# Altium PCB 2 wire active electrode.PcbDoc
Units mil, origin at the board's own origin, x right, y up, seen from the top; angles counter-clockwise.
Board outline 400 x 250 mil, 2 copper layers (Top Layer, Bottom Layer); 3 components, 4 nets, 12 pads, 0 vias.
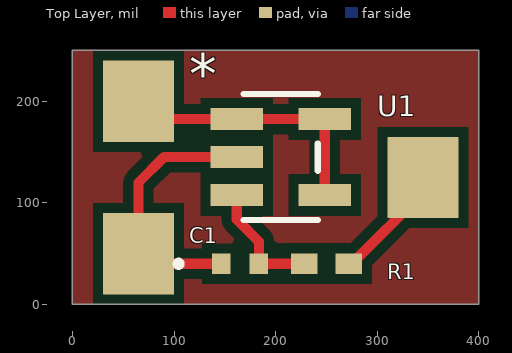
[diagram p0: Top Layer view]
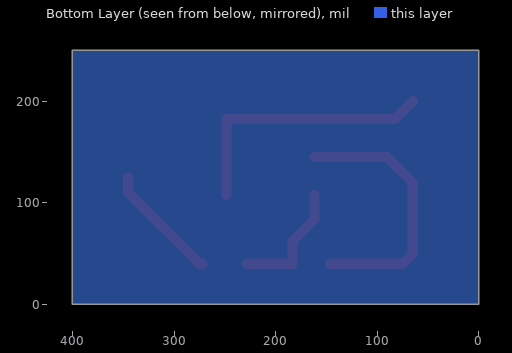
[diagram p1: Bottom Layer view, seen from below]
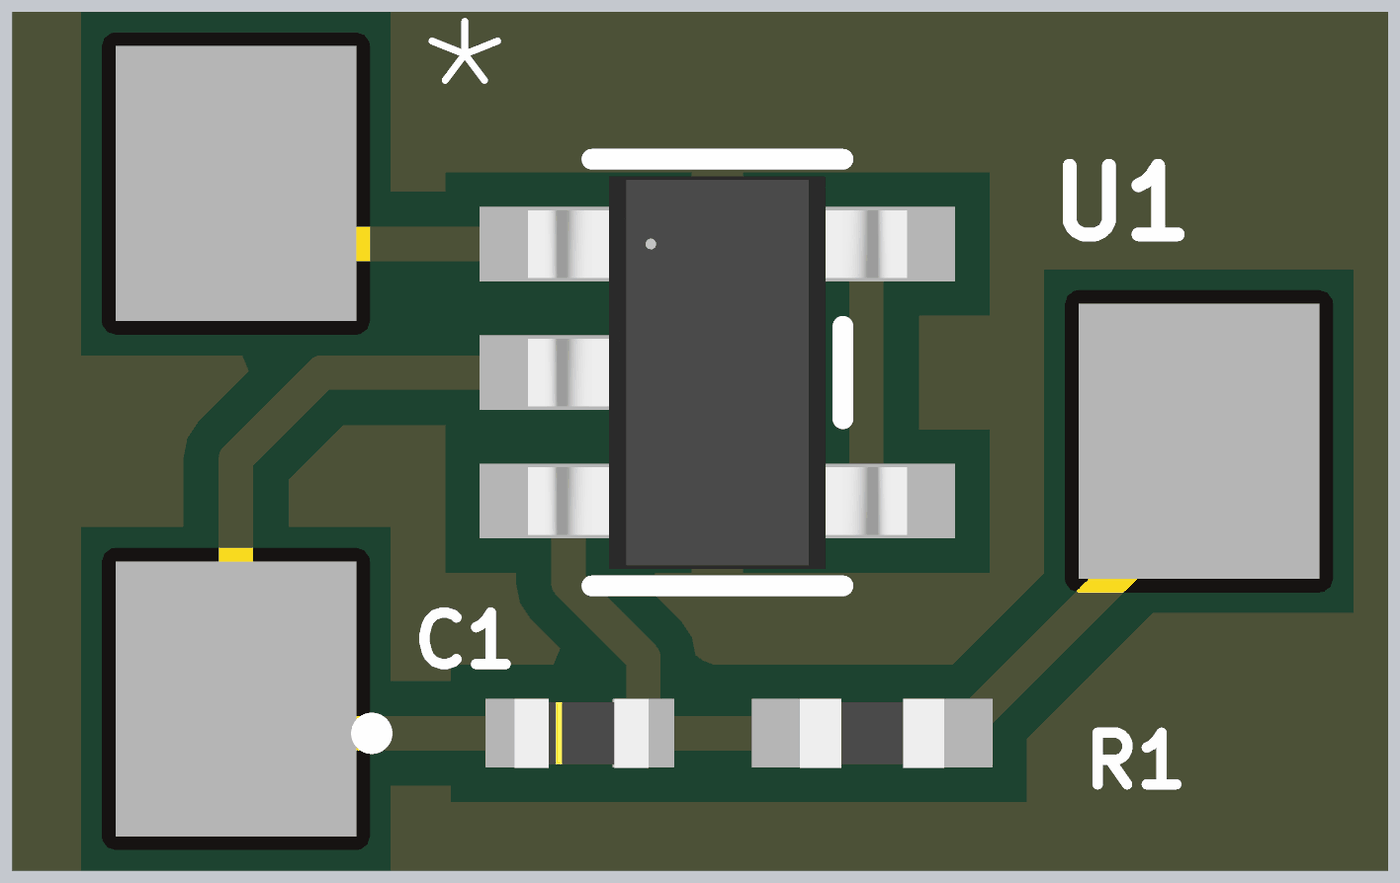
[diagram p2: 3D render of the assembled board from above, using the file's embedded part models]

## Layer stack, top to bottom
Top Solder: solder mask 0.4, Solder Resist, Dk 3.5
Top Layer: signal copper 1.4
Dielectric 1: dielectric 12.6, FR-4, Dk 4.8
Bottom Layer: signal copper 1.4
Bottom Solder: solder mask 0.4, Solder Resist, Dk 3.5

## Board outline
0,0 400,0 400,250 0,250

## Design rules (kind name [scope] priority, off if disabled: settings)
Clearance [All] p1: gap=10 ignorepadtopadclearanceinfootprint=FALSE except(0: Arc-Hole Track-Hole SMDPad-Hole THPad-Hole Via-Hole Fill-Hole Poly-Hole Region-Hole Text-Hole)
PolygonConnect [All] p1: connectstyle=Relief reliefconductorwidth=10 reliefentries=4 polygonreliefangle="90 Angle" airgapwidth=10
RoutingVias [All] p1: holewidth=28 width=50 viastyle="Through Hole" minholewidth=28 minwidth=50 maxholewidth=28 maxwidth=50
SilkToSolderMaskClearance [IsPad] p1: minsilkscreentomaskgap=9 clearancetoexposedcopper=TRUE
SolderMaskExpansion [All] p1: expansion=4
Width [All] p1: maxlimit=10 minlimit=10 preferedwidth=10
29 further rules are at their usual default settings.

## Classes and differential pairs
component class 2wire: R1 U1

## Components (designator, comment, footprint, x,y, rotation, side; value= is the part's Value field where it differs from the comment)
C1 "C0402C241J3GAC7867" G-155 165,40 r0 top value=240pF
R1 "Part Number: RC0402JR-0710KL" RC0402N 250,40 r180 top value=Value
U1 "Part Number: AD8603AUJZ-R2" UJ_5 205,145 r0 top value=Value

## Footprints (in the part's own frame and the unit in brackets; to place one, negate y for a bottom-side part, rotate by r counter-clockwise, add the part's x,y. Pads: shape width x height; smd on the part's side, far side on the other; paste and mask are expansions set on the pad)
G-155 [mil]
  rect 18x20 smd paste+0 mask+0: 1(-18.5,0) 2(18.5,0)
  silkscreen extent -63,-3 -58,3, body extent -19,-10 20,10, height 22
RC0402N [mil]
  rect 26x20 smd paste+0 mask+0: 1(-22,0) 2(22,0)
  body extent -21,-10 21,10, height 28
UJ_5 [mm]
  rect 1.311x0.551 smd paste+0 mask+0: 1(-1.1,0.95) 2(-1.1,0) 3(-1.1,-0.95) 4(1.1,-0.95) 5(1.1,0.95)
  silkscreen extent -0.93,-1.58 0.93,1.58, body extent -1.4,-1.45 1.4,1.45, height 0.9

## Part data
C1: library part "C0402C241J3GAC7867 - 240pf", "Imported", Manufacturer_Part_Number=C0402C241J3GAC7867, Vendor=KEMET
R1: library part 8355, "RES, 10K, 0.1%, 1/16W, 0402", Manufacturer_Part_Number=RC0402JR-0710KL, Built_By=EMA_UL_Team, Copyright="Copyright (C) 2018 Accelerated Designs. All rights reserved", RefDes=RefDes, Type=DEV, Vendor=Yageo
U1: library part AD8603AUJZ-R2, "No Description Available", Built_By=Analog_Devices_Team, Copyright="Copyright (C) 2018 Accelerated Designs. All rights reserved", Manufacturer_Part_Number=AD8603AUJZ-R2, RefDes=RefDes, Type=DEV, Vendor="Analog Devices Inc"

## Free pads (board coordinates)
  rect 70x80 smd: 1(65,200) 2(65,50) 3(345,125)

## Nets (pads, with @x,y where several pads share a name; then routed paths per layer and width w, separated by ;. In a path a pad name is that pad's centre, name@x,y a point inside that pad or via, vN(x,y) a via of type N, cw(c..) or ccw(c..) an arc to the next point about the centre after c; other vN are vias at no path point)
NetC1_1: C1.1 pad.2 U1.2 | length 262.7
  Top Layer w10: C1.1 75,40 pad.2 65,120 90,145 U1.2
NetC1_2: C1.2 R1.2 U1.3 | length 121.1
  Top Layer w10: U1.3 161.69,83.81 183.5,62 C1.2 R1.2
NetR1_1: pad.3 R1.1 | length 117
  Top Layer w10: R1.1 275,40 345,110 pad.3
NetU1_1: pad.1 U1.1 U1.4 U1.5 | length 265.4
  Top Layer w10: pad.1 82.6,182.4 U1.1 U1.5 U1.4

## Polygon pours and split planes (outlines as drawn)
no net on Top Layer "Top Layer-No Net" (solid, pour order 0): 0,0 0,250 400,250 400,0
no net on Bottom Layer "Bottom Layer-No Net" (solid, pour order 2): 0,0 0,250 400,250 400,0

## Silkscreen, mask and mechanical layers (free items; w line width, h text height)
Mechanical 4:
  drawing of 68 lines, arcs and shapes, not listed
  text "1" at -1493.66,6305 h70
  text "2" at 1002,6305 h70
  text "3" at 3491.34,6305 h70
  text "4" at 5998.01,6305 h70
  text "5" at 8497,6305 h70
  text "6" at 11002,6305 h70
  text "ELECTRONIC REVISION HISTORY ON FILE" at 7775.3,6011.01 h107.82
  text "REV" at 6199.18,5783.55 h65
  text "DESCRIPTION" at 8750.14,5780.85 h65
  text "1.0" at 6210,5635 h60
  text "Initial Release" at 6610,5635 h60
  text "A" at -2650,5162 h70
  text "A" at 12150,5162 h70
  text "FABRICATION NOTES" at 6420,3383 h150
  text "1.  PCB SUBSTRATE MATERIAL:  FR4" at 5120,2983 h150
  text "2.  FINISHED THICKNESS SHALL BE 62 MIL" at 5120,2783 h150
  text "B" at -2650,2782 h70
  text "B" at 12150,2782 h70
  text "3.  HOLE DIMENSIONS TO APPLY AFTER PLATING" at 5120,2583 h150
  text "4.  COPPER WEIGHT: 1 OZ" at 5120,2383 h150
  text "5.  SILKSCREEN COLOR: WHITE" at 5120,2183 h150
  text "6.  SOLDER MASK: BLACK" at 5120,1983 h150
  text "7.  FINISH:ENIG" at 5127,1754 h150
  text "8.  NO MOUSEBITES AROUND PERIMETER OF BOARD" at 5133,1523 h150
  text "C" at -2650,407 h70
  text "C" at 12150,407 h70
  text "DRAWN:" at 6884.92,-1335.01 h48.89
  text "HOLE TOLERANCES" at 4422.66,-1369.72 h59.06
  text "THIRD ANGLE PROJECTION" at 5272.25,-1377.59 h59.63
  text "'.Print_Date'" at 7787.28,-1421.7 h71.55
  text "Kin Seto" at 6891.68,-1443.14 h71.55
  text "ON ALL HOLE DIAMETERS" at 4209.18,-1515.01 h59.06
  text "CHECKED:" at 6878.16,-1551.26 h48.89
  text "'.Print_Date'" at 7773.51,-1628.4 h71.55
  text "'.CHECKED BY'" at 6913.58,-1661.11 h64.39
  text "100 Mayfield Ave / Mountain View, CA 94043" at 9624,-1673 h78.74
  text "APPROVED:" at 6878.16,-1767.51 h48.89
  text "DRAWING TITLE:" at 8453.39,-1802.86 h59.63
  text "'.Print_Date'" at 7784.51,-1845.4 h71.55
  text "'.APPROVED BY'" at 6883.58,-1858.11 h64.39
  text "D" at -2650,-1963 h70
  text "D" at 12150,-1963 h70
  text "PCB, Active Electrode, Amber" at 9151.18,-1987.37 h130
  text "DIMENSIONAL TOLERANCES:" at 5470,-2075 h71.55
  text "DRAWING NUMBER:" at 8972.38,-2393.48 h59.63
  text "REV:" at 10860,-2395 h59.63
  text "SIZE:" at 8470.89,-2396.25 h59.63
  text "1.0" at 10910,-2590 h135.14
  text "B" at 8623.68,-2601.62 h135.14
  text "651-02728-01" at 9175,-2601.62 h135.14
  text "SCALE:" at 8460.15,-2789.48 h59.63
  text "CAGE CODE:" at 9311.61,-2789.48 h60.82
  text "SYSTEM:" at 10183.09,-2794.48 h60.82
  text "SHEET:" at 11216.64,-2794.2 h59.63
  text "OF" at 11721.45,-2794.48 h59.63
  text "NONE" at 8845.33,-2803 h89.44
  text "1" at 11583.35,-2809.1 h89.44
  text "1" at 11911.31,-2809.1 h89.44
  text "ALTIUM" at 10629.1,-2814.75 h89.44
  text "UNLESS OTHERWISE SPECIFIED / DIMENSIONS IN MIL (MM) / AND PER ASME Y 14.5M / PTH SIZE 8(0.2) OR LESS:  +3/-8 (+0.07/-0.2) / ALL OTHER HOLES:  ± 5 (0.12)" at 5355,-2880 h98.43
  text "1" at -1493.66,-2995 h70
  text "2" at 1002,-2995 h70
  text "3" at 3491.34,-2995 h70
  text "4" at 5998.01,-2995 h70
  text "5" at 8497,-2995 h70
  text "6" at 11002,-2995 h70
Mechanical 13:
  the board outline again, w10

## Text inside footprints (layer, text, board x,y; h text height)
U1: Top Overlay "*" at 115,207.09 h40; Mechanical 13 "*" at 171,161.09 h50